# Altium PCB PCB1.PcbDoc
Units mm, origin at the board's own origin, x right, y up, seen from the top; angles counter-clockwise.
Board outline 82.11 x 35.81 mm, 2 copper layers (Top Layer, Bottom Layer); 23 components, 12 nets, 50 pads, 0 vias.
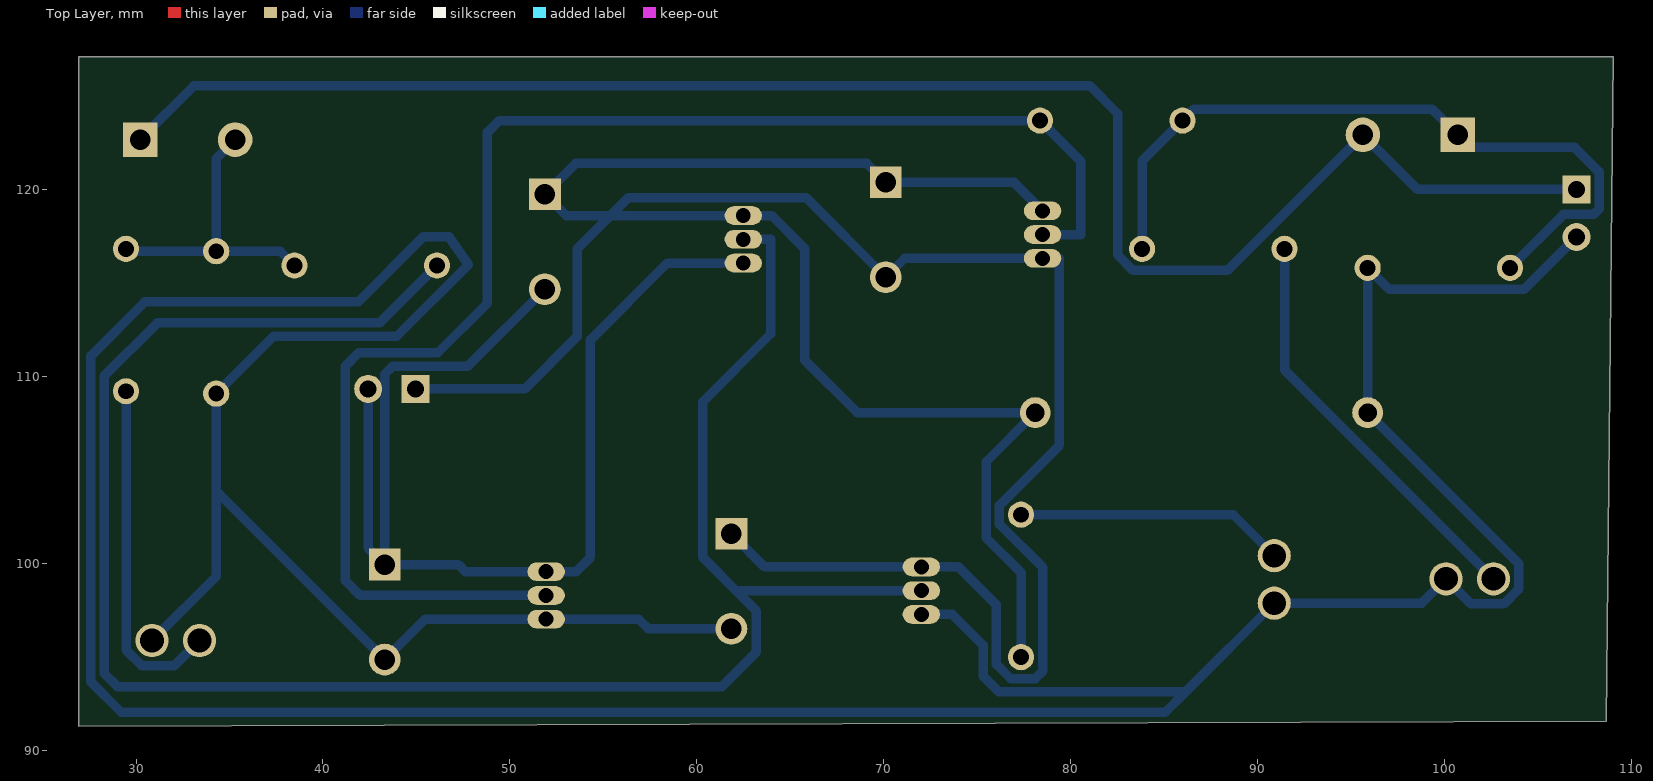
[diagram p0: Top Layer view]
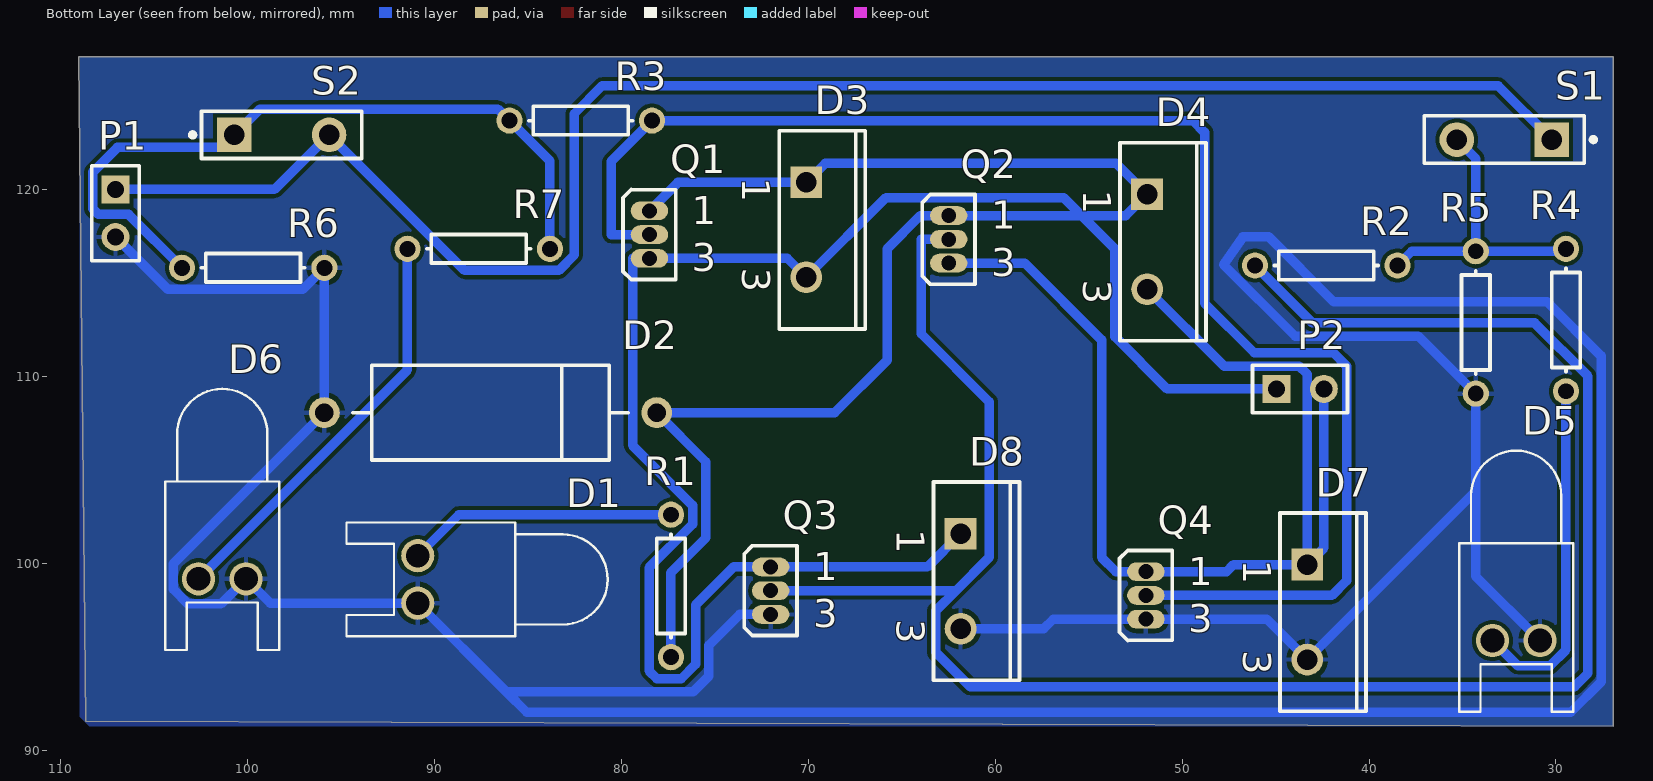
[diagram p1: Bottom Layer view, seen from below]

## Layer stack, top to bottom
Top Solder: solder mask 0.0102, Solder Resist, Dk 3.5
Top Layer: signal copper 0.0356
Dielectric 1: dielectric 0.32, FR-4, Dk 4.8
Bottom Layer: signal copper 0.0356
Bottom Solder: solder mask 0.0102, Solder Resist, Dk 3.5

## Board outline
26.924,91.312 108.64,91.567 109.035,127.127 26.924,127.127

## Design rules (kind name [scope] priority, off if disabled: settings)
Clearance [All] p1: gap=0.2 ignorepadtopadclearanceinfootprint=FALSE
HoleSize [All] p1: absolutevalues=TRUE maxlimit=6.3 minlimit=0.15 maxpercent=80.000 minpercent=20.000
PolygonConnect [All] p1: connectstyle=Relief reliefconductorwidth=0.254 reliefentries=4 polygonreliefangle="90 Angle" airgapwidth=0.254
RoutingLayers [All] p1: top layer_v5=FALSE bottom layer_v5=TRUE
RoutingVias [All] p1: holewidth=0.711 width=1.27 viastyle="Through Hole" minholewidth=0.711 minwidth=1.27 maxholewidth=0.711 maxwidth=1.27
ShortCircuit [All] p1: allowed=TRUE
SolderMaskExpansion [All] p1: expansion=0.102 istentingtop=FALSE
Width [All] p1: maxlimit=2.032 minlimit=0.508 preferedwidth=0.508
27 further rules are at their usual default settings.

## Components (designator, comment, footprint, x,y, rotation, side; value= is the part's Value field where it differs from the comment)
D1 "LED0" LED-0 90.888,99.153 r90 bottom
D2 "D Zener" DIODE-0.7 86.995,108.077 r180 bottom
D3 "Diode 10TQ045" TO-220AC 70.104,117.856 r270 bottom
D4 "Diode 10TQ045" TO-220AC 51.872,117.221 r270 bottom
D5 "LED0" LED-0 32.131,95.885 r0 bottom
D6 "LED0" LED-0 101.346,99.187 r0 bottom
D7 "Diode 10TQ045" TO-220AC 43.307,97.409 r270 bottom
D8 "Diode 10TQ045" TO-220AC 61.849,99.06 r270 bottom
P1 "Header 2" HDR1X2 107.061,120.015 r270 bottom
P2 "Header 2" HDR1X2 44.958,109.347 r180 bottom
Q1 "MOSFET-P" E3 78.496,117.602 r180 bottom
Q2 "MOSFET-P" E3 62.484,117.348 r180 bottom
Q3 "MOSFET-N" E3 72.009,98.552 r180 bottom
Q4 "MOSFET-N" E3 51.943,98.298 r180 bottom
R1 "Res1" AXIAL-0.3 77.343,98.806 r90 bottom value=1K
R2 "Res1" AXIAL-0.3 42.291,115.951 r0 bottom value=1K
R3 "Res1" AXIAL-0.3 82.169,123.698 r0 bottom value=1K
R4 "Res1" AXIAL-0.3 29.464,113.03 r90 bottom value=330Ohm
R5 "Res1" AXIAL-0.3 34.29,112.903 r90 bottom value=1K
R6 "Res1" AXIAL-0.3 99.695,115.824 r0 bottom value=1K
R7 "Res1" AXIAL-0.3 87.63,116.84 r0 bottom value=330Ohm
S1 "SW-PB" SPST-2 32.762,122.682 r0 bottom
S2 "SW-PB" SPST-2 98.171,122.936 r180 bottom

## Footprints (in the part's own frame and the unit in brackets; to place one, negate y for a bottom-side part, rotate by r counter-clockwise, add the part's x,y. Pads: shape width x height; smd on the part's side, far side on the other; paste and mask are expansions set on the pad)
AXIAL-0.3 [mm] "Axial Device, Thru-Hole; 2 Leads; 0.3 in Pin Spacing"
  round 1.4 hole 0.85: 1(-3.81,0) 2(3.81,0)
  silkscreen extent -2.77,-0.76 2.77,0.76
DIODE-0.7 [mm] "Diode, Thru-Hole; 2 Leads; 0.7 in Pin Spacing"
  round 1.65 hole 1: 1(-8.89,0) 2(8.89,0)
  silkscreen extent -7.37,-2.54 7.37,2.54
E3 [mm] "TO, Flat Index; 3 In-Line, Axial Leads; Body Dia. 4.6mm; Lead Dia. 0.5 mm (max)"
  oval 2x1 hole 0.8: 1(0,1.27) 2(0,0) 3(0,-1.27)
  silkscreen extent -1.41,-2.41 1.41,2.41
HDR1X2 [mm] "Connector; Header; 2 Position"
  rect 1.5x1.5 hole 0.9: 1(0,0)
  round 1.5 hole 0.9: 2(2.54,0)
  silkscreen extent -1.27,-1.27 3.81,1.27
LED-0 [mil] "LED; 2 Leads"
  round 70 hole 50: 1(50,0) 2(-50,0)
  silkscreen extent -120,-400 120,150
SPST-2 [mm] "Switch; 2 Leads"
  rect 1.85x1.85 hole 1.1: 1(-2.54,0)
  round 1.85 hole 1.1: 2(2.54,0)
  silkscreen extent -4.89,-1.27 4.28,1.27
TO-220AC [mm] "TO, Thru-Hole, Vertical, Heatsink Mounted; 3 In-Line Leads (1 Absent); Pitch 2.54 mm"
  rect 1.7x1.7 hole 1.1: 1(-2.54,0)
  round 1.7 hole 1.1: 3(2.54,0)
  silkscreen extent -5.3,-1.45 5.3,3.15

## Part data
D1 D5 D6: "Typical INFRARED GaAs LED", LatestRevisionDate=08-Jul-2005, LatestRevisionNote="Mech Layer 1 removed.", PackageDescription="LED; 2 Leads", PackageReference=LED-0, Published=8-Jun-2000, Publisher="Altium Limited"
D2: "Zener Diode", LatestRevisionDate=17-Jul-2002, LatestRevisionNote="Re-released for DXP Platform.", PackageDescription="Diode, Thru-Hole; 2 Leads; 0.7 in Pin Spacing", PackageReference=DIODE-0.7, Published=8-Jun-2000, Publisher="Altium Limited"
D3 D4 D7 D8: "Schottky Rectifier", ComponentLink1Description="Manufacturer Link", ComponentLink1URL=http://www.irf.com/, ComponentLink2Description=Datasheet, ComponentLink2URL=http://www.irf.com/product-info/datasheets/data/10tq.pdf, DatasheetVersion=PD-2.057B, LatestRevisionDate=17-Jul-2002, LatestRevisionNote="Re-released for DXP Platform.", Note="Terminal 2 is the TAB and is electrically connected to the cathode", PackageDescription="TO, Thru-Hole, Vertical, Heatsink Mounted; 3 In-Line Leads (1 Absent); Pitch 2.54 mm", PackageReference=TO-220AC, PackageVersion=Feb-1998, Published=8-Jun-2000, Publisher="Altium Limited"
P1 P2: "Header, 2-Pin", LatestRevisionDate=17-Jul-2002, LatestRevisionNote="Re-released for DXP Platform.", Publisher="Altium Limited"
Q1 Q2: "P-Channel MOSFET", LatestRevisionDate=17-Jul-2002, LatestRevisionNote="Re-released for DXP Platform.", PackageDescription="TO, Flat Index; 3 In-Line, Axial Leads; Body Dia. 4.6mm; Lead Dia. 0.5 mm (max)", PackageReference=E3, PackageVersion=1995/1996, Published=8-Jun-2000, Publisher="Altium Limited"
Q3 Q4: "N-Channel MOSFET", LatestRevisionDate=17-Jul-2002, LatestRevisionNote="Re-released for DXP Platform.", PackageDescription="TO, Flat Index; 3 In-Line, Axial Leads; Body Dia. 4.6mm; Lead Dia. 0.5 mm (max)", PackageReference=E3, PackageVersion=1995/1996, Published=8-Jun-2000, Publisher="Altium Limited"
R1 R2 R3 R4 R5 R6 R7: "Resistor", LatestRevisionDate=17-Jul-2002, LatestRevisionNote="Re-released for DXP Platform.", PackageDescription="Axial Device, Thru-Hole; 2 Leads; 0.3 in Pin Spacing", PackageReference=AXIAL-0.3, Published=8-Jun-2000, Publisher="Altium Limited"
S1 S2: "Switch", LatestRevisionDate=17-Jul-2002, LatestRevisionNote="Re-released for DXP Platform.", PackageDescription="Switch; 2 Leads", PackageReference=SPST-2, Published=24-Mar-1999, Publisher="Altium Limited"

## Nets (pads, with @x,y where several pads share a name; then routed paths per layer and width w, separated by ;. In a path a pad name is that pad's centre, name@x,y a point inside that pad or via, vN(x,y) a via of type N, cw(c..) or ccw(c..) an arc to the next point about the centre after c; other vN are vias at no path point)
+5: P1.1 S1.1 S2.2 | length 90.8
  Bottom Layer w0.508: S1.1 33.1,125.56 81.023,125.56 82.515,124.068 82.515,116.513 83.342,115.686 88.381,115.686 S2.2 98.552,120.015 P1.1
+12: D2.2 D3.1 D4.1 Q1.1 Q2.1 R1.1 | length 77.9
  Bottom Layer w0.508: R1.1 77.343,99.517 75.481,101.379 75.481,105.453 D2.2 68.58,108.077 65.786,110.871 65.786,116.84 64.008,118.618 Q2.1 53.015,118.618 D4.1 53.523,121.412 69.088,121.412 D3.1 76.972,120.396 Q1.1
GND: D1.2 D2.1 D5.2 D6.2 D7.3 D8.3 P1.2 Q3.3 Q4.3 R5.1 R6.1 | length 235.5
  Bottom Layer w0.508: D5.2 34.29,99.314 34.29,103.886 ; D8.3 57.404,96.52 56.896,97.028 Q4.3 45.466,97.028 D7.3 34.29,103.886 ; Q3.3 73.66,97.282 75.311,95.631 75.311,93.98 76.157,93.134 86.138,93.134 ; P1.2 104.256,114.67 97.039,114.67 R6.1 D2.1 103.959,100.003 103.959,98.631 103.172,97.844 101.419,97.844 D6.2 98.772,97.883 D1.2 86.138,93.134 ; 34.29,103.886 R5.1 37.357,112.16 43.949,112.16 47.777,115.988 46.749,117.475 45.359,117.475 41.892,114.008 30.48,114.008 27.584,111.112 27.584,93.675 29.21,92.05 85.054,92.05 86.138,93.134
NetD1_1: D1.1 R1.2 | length 14.5
  Bottom Layer w0.508: R1.2 88.695,102.616 D1.1
NetD3_3: D3.3 D8.1 P2.1 Q1.3 Q3.1 | length 89.9
  Bottom Layer w0.508: P2.1 50.8,109.347 53.594,112.141 53.594,116.84 56.337,119.583 65.837,119.583 D3.3 71.12,116.332 Q1.3 79.4,116.332 79.4,106.324 76.189,103.113 76.189,102.108 78.511,99.786 78.511,94.259 78.094,93.842 76.795,93.842 76.022,94.615 76.022,97.79 73.99,99.822 Q3.1 63.627,99.822 D8.1
NetD4_3: D4.3 D7.1 P2.2 Q2.3 Q4.1 | length 63.4
  Bottom Layer w0.508: P2.2 42.418,100.838 D7.1 ; D4.3 47.757,110.566 43.739,110.566 43.307,110.134 D7.1 ; Q2.3 58.42,116.078 54.305,111.963 54.305,100.33 53.543,99.568 Q4.1 47.625,99.568 47.244,99.949 D7.1
NetD5_1: D5.1 R4.1 | length 18.7
  Bottom Layer w0.508: R4.1 29.464,95.383 30.305,94.542 32.058,94.542 D5.1
NetD6_1: D6.1 R7.2 | length 22.3
  Bottom Layer w0.508: R7.2 91.44,110.363 D6.1
NetQ1_2: Q1.2 Q4.2 R3.1 | length 79.5
  Bottom Layer w0.508: Q4.2 41.986,98.298 41.199,99.085 41.199,110.566 41.91,111.277 46.139,111.277 48.793,113.932 48.793,123.063 49.428,123.698 R3.1 80.543,121.514 80.543,117.602 Q1.2
NetQ2_2: Q2.2 Q3.2 R2.2 | length 108.2
  Bottom Layer w0.508: R2.2 43.028,112.878 31.14,112.878 28.296,110.033 28.296,94.132 29.007,93.421 61.341,93.421 63.17,95.25 63.17,97.485 62.103,98.552 ; Q2.2 63.957,117.348 63.957,112.293 60.325,108.661 60.325,100.33 62.103,98.552 ; Q3.2 62.103,98.552
NetR2_1: R2.1 R4.2 R5.2 S1.2 | length 15.8
  Bottom Layer w0.508: R4.2 29.591,116.713 R5.2 ; S1.2 34.29,121.67 R5.2 ; R2.1 37.719,116.713 R5.2
NetR3_2: R3.2 R6.2 R7.1 S2.1 | length 39.7
  Bottom Layer w0.508: R7.1 83.82,121.539 R3.2 86.596,124.315 99.332,124.315 S2.1 101.382,122.265 106.953,122.265 108.265,120.953 108.265,118.977 107.967,118.679 106.36,118.679 R6.2

## Polygon pours and split planes (outlines as drawn)
GND on Bottom Layer "NONET_L-01_P-001" (solid, remove dead copper, pour order 0): 26.924,127.127 26.924,91.313 108.458,91.313 108.966,91.821 108.966,127.127

## Text inside footprints (layer, text, board x,y; h text height)
D3: Bottom Overlay "1" at 73.529,120.646 h1.5 r90; Bottom Overlay "3" at 73.529,115.816 h1.5 r90
D4: Bottom Overlay "3" at 55.297,115.181 h1.5 r90; Bottom Overlay "1" at 55.297,120.011 h1.5 r90
D7: Bottom Overlay "1" at 46.732,100.199 h1.5 r90; Bottom Overlay "3" at 46.732,95.369 h1.5 r90
D8: Bottom Overlay "1" at 65.274,101.85 h1.5 r90; Bottom Overlay "3" at 65.274,97.02 h1.5 r90
Q1: Bottom Overlay "1" at 76.221,118.157 h1.5; Bottom Overlay "3" at 76.221,115.639 h1.5
Q2: Bottom Overlay "1" at 60.209,117.903 h1.5; Bottom Overlay "3" at 60.209,115.385 h1.5
Q3: Bottom Overlay "1" at 69.734,99.107 h1.5; Bottom Overlay "3" at 69.734,96.589 h1.5
Q4: Bottom Overlay "1" at 49.668,98.853 h1.5; Bottom Overlay "3" at 49.668,96.335 h1.5